# Altium PCB Main.PcbDoc
Units mm, origin at the board's own origin, x right, y up, seen from the top; angles counter-clockwise.
Board outline 198 x 54 mm, 2 copper layers (Top Layer, Bottom Layer); 70 components, 64 nets, 241 pads, 61 vias.
Unrouted connection lines stored in the file: 1.
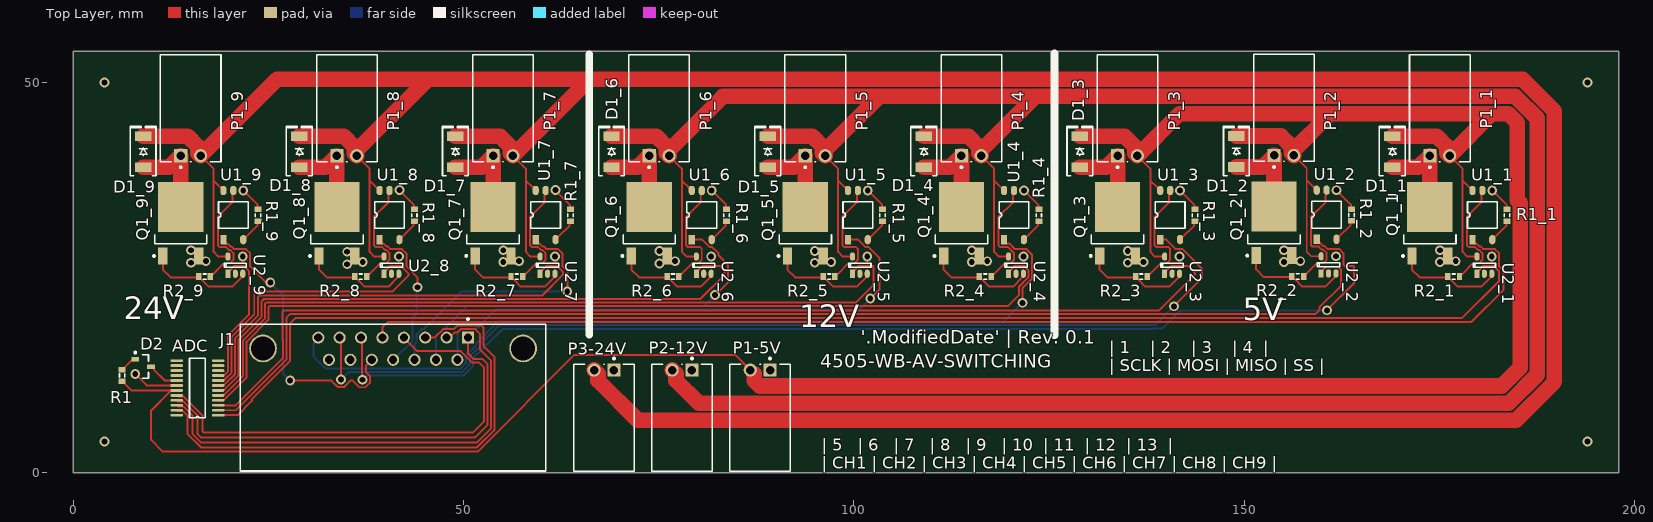
[diagram p0: Top Layer view]
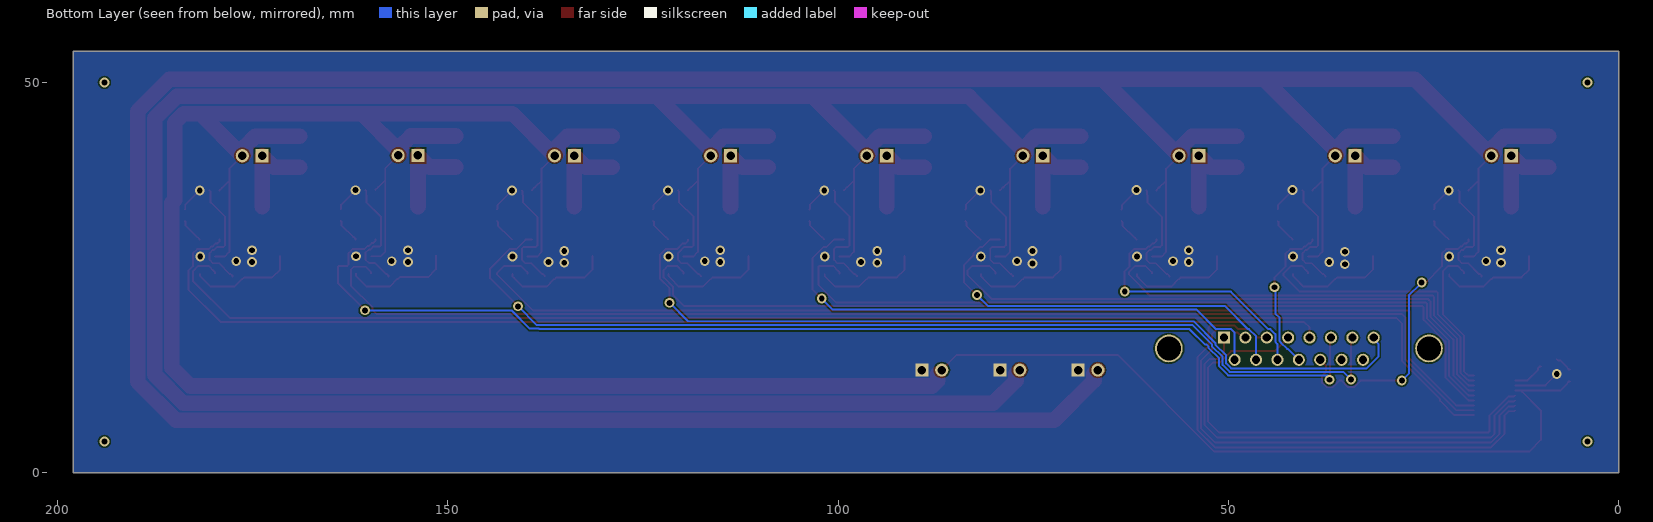
[diagram p1: Bottom Layer view, seen from below]

## Layer stack, top to bottom
Top Solder: solder mask 0.0102, Solder Resist, Dk 3.5
Top Layer: signal copper 0.0356
Dielectric 1: dielectric 0.32, FR-4, Dk 4.8
Bottom Layer: signal copper 0.0356
Bottom Solder: solder mask 0.0102, Solder Resist, Dk 3.5

## Board outline
0,0 198,0 198,54 0,54

## Design rules (kind name [scope] priority, off if disabled: settings)
Clearance [All] p1: gap=0.2 ignorepadtopadclearanceinfootprint=TRUE except(0: Arc-Hole Track-Hole SMDPad-Hole THPad-Hole Via-Hole Fill-Hole Poly-Hole Region-Hole Text-Hole; 2.5: Fill-Fill Fill-Poly Fill-Region Poly-Poly Poly-Region Region-Region)
HoleSize [All] p1: absolutevalues=TRUE maxlimit=5 minlimit=0.025 maxpercent=80.000 minpercent=20.000
MinimumSolderMaskSliver [All] p1: minsoldermaskwidth=0.1
PlaneClearance [All] p1: clearance=0.5
PlaneConnect [All] p1: planeconnectstyle=Direct reliefexpansion=0.508 reliefentries=4 reliefconductorwidth=0.254 reliefairgap=0.254
PolygonConnect [All] p1: connectstyle=Direct reliefconductorwidth=0.254 reliefentries=4 polygonreliefangle="90 Angle" airgapwidth=0.254
RoutingCorners [All] p1: cornerstyle=45-Degree minsetback=2.5 maxsetback=2.5
RoutingVias [All] p1: holewidth=0.75 width=1.25 viastyle="Through Hole" minholewidth=0.75 minwidth=1.25 maxholewidth=1.5 maxwidth=2.5
SilkToSilkClearance [All] p1: silktosilkclearance=0.2
SilkToSolderMaskClearance [IsPad] p1: minsilkscreentomaskgap=0.1 clearancetoexposedcopper=TRUE
SolderMaskExpansion [All] p1: expansion=0.05 istentingtop=FALSE
Width [All] p1: maxlimit=2.5 minlimit=0.25 preferedwidth=0.25 minimp=50.000000 maximp=50.000000 favimp=50.000000
23 further rules are at their usual default settings.

## Classes and differential pairs
channel class "Cuurent Monitored Power Switch": "SW 5-0" "SW 5-1" "SW 5-2" "SW 12-0" "SW 12-1" "SW 12-2" "SW 24-0" "SW 24-1" "SW 24-2"
component class "SW 24-2": D1_9 P1_9 Q1_9 R1_9 R2_9 U1_9 U2_9
component class "SW 24-1": D1_8 P1_8 Q1_8 R1_8 R2_8 U1_8 U2_8
component class "SW 24-0": D1_7 P1_7 Q1_7 R1_7 R2_7 U1_7 U2_7
component class "SW 12-2": D1_6 P1_6 Q1_6 R1_6 R2_6 U1_6 U2_6
component class "SW 12-1": D1_5 P1_5 Q1_5 R1_5 R2_5 U1_5 U2_5
component class "SW 12-0": D1_4 P1_4 Q1_4 R1_4 R2_4 U1_4 U2_4
component class "SW 5-2": D1_3 P1_3 Q1_3 R1_3 R2_3 U1_3 U2_3
component class "SW 5-1": D1_2 P1_2 Q1_2 R1_2 R2_2 U1_2 U2_2
component class "SW 5-0": D1_4 P1_5 Q1_6 R1_4 R2_4 U1_5 U2_4
component class Main: ADC D2 J1 P1-5V P2-12V P3-24V R1

## Components (designator, comment, footprint, x,y, rotation, side; value= is the part's Value field where it differs from the comment)
ADC "MAX11642EEG+" QSOP-24 18.581,7.366 r180 top
D1_1 "GS1GE" "DO214AC SMA" 168.964,41.109 r90 top (schematic designator D1)
D1_2 "GS1GE" "DO214AC SMA" 149.005,41.147 r90 top (schematic designator D1)
D1_3 "GS1GE" "DO214AC SMA" 128.964,41.109 r90 top (schematic designator D1)
D1_4 "GS1GE" "DO214AC SMA" 108.964,41.109 r90 top (schematic designator D1)
D1_5 "GS1GE" "DO214AC SMA" 88.964,41.109 r90 top (schematic designator D1)
D1_6 "GS1GE" "DO214AC SMA" 68.964,41.109 r90 top (schematic designator D1)
D1_7 "GS1GE" "DO214AC SMA" 48.964,41.109 r90 top (schematic designator D1)
D1_8 "GS1GE" "DO214AC SMA" 28.964,41.109 r90 top (schematic designator D1)
D1_9 "GS1GE" "DO214AC SMA" 8.964,41.109 r90 top (schematic designator D1)
D2 "LM4040AIM3-2.0/NOPB" MF03A_L 8.953,13.589 r0 top
J1 "5745782-4" TECO-5745782-4_V 40.98,15.885 r0 top
P1-5V "70553-0001" Molex_70553-0001_MFG 88,7.06 r0 top (schematic designator P1)
P1_1 "70553-0001" Molex_70553-0001_MFG 175.06,46.697 r180 top (schematic designator P1)
P1_2 "70553-0001" Molex_70553-0001_MFG 155.101,46.735 r180 top (schematic designator P1)
P1_3 "70553-0001" Molex_70553-0001_MFG 135.06,46.697 r180 top (schematic designator P1)
P1_4 "70553-0001" Molex_70553-0001_MFG 115.06,46.697 r180 top (schematic designator P1)
P1_5 "70553-0001" Molex_70553-0001_MFG 95.06,46.697 r180 top (schematic designator P1)
P1_6 "70553-0001" Molex_70553-0001_MFG 75.06,46.697 r180 top (schematic designator P1)
P1_7 "70553-0001" Molex_70553-0001_MFG 55.06,46.697 r180 top (schematic designator P1)
P1_8 "70553-0001" Molex_70553-0001_MFG 35.06,46.697 r180 top (schematic designator P1)
P1_9 "70553-0001" Molex_70553-0001_MFG 15.06,46.697 r180 top (schematic designator P1)
P2-12V "70553-0001" Molex_70553-0001_MFG 78,7.06 r0 top (schematic designator P2)
P3-24V "70553-0001" Molex_70553-0001_MFG 68,7.06 r0 top (schematic designator P3)
Q1_1 "IKD03N60RF" INF-PG-TO252-3-21_V 173.79,31.965 r90 top (schematic designator Q1)
Q1_2 "IKD03N60RF" INF-PG-TO252-3-21_V 153.831,32.003 r90 top (schematic designator Q1)
Q1_3 "IKD03N60RF" INF-PG-TO252-3-21_V 133.79,31.965 r90 top (schematic designator Q1)
Q1_4 "IKD03N60RF" INF-PG-TO252-3-21_V 113.79,31.965 r90 top (schematic designator Q1)
Q1_5 "IKD03N60RF" INF-PG-TO252-3-21_V 93.79,31.965 r90 top (schematic designator Q1)
Q1_6 "IKD03N60RF" INF-PG-TO252-3-21_V 73.79,31.965 r90 top (schematic designator Q1)
Q1_7 "IKD03N60RF" INF-PG-TO252-3-21_V 53.79,31.965 r90 top (schematic designator Q1)
Q1_8 "IKD03N60RF" INF-PG-TO252-3-21_V 33.79,31.965 r90 top (schematic designator Q1)
Q1_9 "IKD03N60RF" INF-PG-TO252-3-21_V 13.79,31.965 r90 top (schematic designator Q1)
R1 "0603" J1-0603 6.286,12.446 r270 top value=30K
R1_1 "0603" J1-0603 183.696,32.981 r270 top value=120 (schematic designator R1)
R1_2 "0603" J1-0603 163.737,33.019 r270 top value=120 (schematic designator R1)
R1_3 "0603" J1-0603 143.696,32.981 r270 top value=120 (schematic designator R1)
R1_4 "0603" J1-0603 123.696,32.981 r270 top value=120 (schematic designator R1)
R1_5 "0603" J1-0603 103.696,32.981 r270 top value=120 (schematic designator R1)
R1_6 "0603" J1-0603 83.696,32.981 r270 top value=120 (schematic designator R1)
R1_7 "0603" J1-0603 63.696,32.981 r270 top value=120 (schematic designator R1)
R1_8 "0603" J1-0603 43.696,32.981 r270 top value=120 (schematic designator R1)
R1_9 "0603" J1-0603 23.696,32.981 r270 top value=120 (schematic designator R1)
R2_1 "0603" J1-0603 176.838,25.107 r0 top value=10 (schematic designator R2)
R2_2 "0603" J1-0603 156.879,25.145 r0 top value=10 (schematic designator R2)
R2_3 "0603" J1-0603 136.838,25.107 r0 top value=10 (schematic designator R2)
R2_4 "0603" J1-0603 116.838,25.107 r0 top value=10 (schematic designator R2)
R2_5 "0603" J1-0603 96.838,25.107 r0 top value=10 (schematic designator R2)
R2_6 "0603" J1-0603 76.838,25.107 r0 top value=10 (schematic designator R2)
R2_7 "0603" J1-0603 56.838,25.107 r0 top value=10 (schematic designator R2)
R2_8 "0603" J1-0603 36.838,25.107 r0 top value=10 (schematic designator R2)
R2_9 "0603" J1-0603 16.838,25.107 r0 top value=10 (schematic designator R2)
U1_1 "TLP155E" TB-SO6-5 179.251,29.856 r90 top (schematic designator U1)
U1_2 "TLP155E" TB-SO6-5 159.292,29.894 r90 top (schematic designator U1)
U1_3 "TLP155E" TB-SO6-5 139.251,29.856 r90 top (schematic designator U1)
U1_4 "TLP155E" TB-SO6-5 119.251,29.856 r90 top (schematic designator U1)
U1_5 "TLP155E" TB-SO6-5 99.251,29.856 r90 top (schematic designator U1)
U1_6 "TLP155E" TB-SO6-5 79.251,29.856 r90 top (schematic designator U1)
U1_7 "TLP155E" TB-SO6-5 59.251,29.856 r90 top (schematic designator U1)
U1_8 "TLP155E" TB-SO6-5 39.251,29.856 r90 top (schematic designator U1)
U1_9 "TLP155E" TB-SO6-5 19.251,29.856 r90 top (schematic designator U1)
U2_1 "IR25750" SOT23-5 179.825,25.488 r90 top (schematic designator U2)
U2_2 "IR25750" SOT23-5 159.866,25.526 r90 top (schematic designator U2)
U2_3 "IR25750" SOT23-5 139.825,25.488 r90 top (schematic designator U2)
U2_4 "IR25750" SOT23-5 119.825,25.488 r90 top (schematic designator U2)
U2_5 "IR25750" SOT23-5 99.825,25.488 r90 top (schematic designator U2)
U2_6 "IR25750" SOT23-5 79.825,25.488 r90 top (schematic designator U2)
U2_7 "IR25750" SOT23-5 59.825,25.488 r90 top (schematic designator U2)
U2_8 "IR25750" SOT23-5 39.825,25.488 r90 top (schematic designator U2)
U2_9 "IR25750" SOT23-5 19.825,25.488 r90 top (schematic designator U2)

## Footprints (in the part's own frame and the unit in brackets; to place one, negate y for a bottom-side part, rotate by r counter-clockwise, add the part's x,y. Pads: shape width x height; smd on the part's side, far side on the other; paste and mask are expansions set on the pad)
"DO214AC SMA" [mm] "Molded Diode, 2-Leads, Body 4.30x2.60mm, IPC Medium Density"
  rect 1.27x2.1 smd: 1(-1.985,0) 2(1.985,0)
  silkscreen extent -3.08,-1.65 3.25,1.65, body extent -2.6,-1.37 2.6,1.37, height 2.4
INF-PG-TO252-3-21_V [mm] "DPAK, 3-Leads, Body 6.6x6.1mm, Pitch 2.29mm, Recommended"
  rect 2.2x1.2 smd: 1(-4.2,2.29) 3(-4.2,-2.29)
  rect 6.4x5.8 smd: 2(2.1,0)
  silkscreen extent -4.32,-3.35 -1.5,3.56, body extent -2.65,-3.37 3.58,3.37, height 2.39
J1-0603 [mm] "Chip Resistor, Body 1.6x0.8mm, IPC High Density"
  rect 0.7x0.9 smd: 1(-0.75,0) 2(0.75,0)
  silkscreen extent -0.2,-0.35 0.2,0.35, body extent -0.85,-0.48 0.85,0.48, height 0.9
MF03A_L [mm] "SOT23, 3-Leads, Body 2.9x1.3mm, Pitch 0.95mm, Lead Span 2.4mm, IPC High Density"
  rect 1x0.6 smd: 1(-1,0.95) 2(-1,-0.95) 3(1,0)
  silkscreen extent -1.12,-1.5 0.7,1.92, body extent -0.7,-1.52 0.7,1.52, height 1.12
Molex_70553-0001_MFG [mm]
  rect 1.69x1.69 hole 1.09 paste-1000 mask+0: 1(1.27,6.095)
  round 1.69 hole 1.09 paste-1000 mask+0: 2(-1.27,6.095)
  silkscreen extent -3.88,-6.86 3.88,7.7, body extent -3.98,-6.96 3.98,7.04, height 0.25
QSOP-24 [mm]
  rect 1.6x0.36 smd: 1(0,0)
  oval 1.6x0.36 smd: 2(0,-0.635) 3(0,-1.27) 4(0,-1.905) 5(0,-2.54) 6(0,-3.175) 7(0,-3.81) 8(0,-4.445) 9(0,-5.08) 10(0,-5.715) 11(0,-6.35) 12(0,-6.985) 13(5.31,-6.985) 14(5.31,-6.35) 15(5.31,-5.715) 16(5.31,-5.08) 17(5.31,-4.445) 18(5.31,-3.81) 19(5.31,-3.175) 20(5.31,-2.54) 21(5.31,-1.905) 22(5.31,-1.27) 23(5.31,-0.635) 24(5.31,0)
  silkscreen extent 1.63,-7.3 3.68,0.32
SOT23-5 [mm]
  rect 1.06x0.65 smd: 1(0,0)
  oval 1.06x0.65 smd: 2(0,-0.95) 3(0,-1.9) 4(2.2,-1.9) 5(2.2,0)
  silkscreen extent 0.83,-2.37 1.36,0.48
TB-SO6-5 [mm]
  rect 1.2x0.8 smd: 1(0,0)
  oval 1.2x0.8 smd: 3(0,-2.54) 4(6.3,-2.54) 5(6.3,-1.27) 6(6.3,0)
  silkscreen extent 1.44,-3.18 4.86,0.64
TECO-5745782-4_V [mm] "THD, 15-Leads, Body 39.14x18.8mm, Pitch 2.74mm"
  rect 1.55x1.55 hole 1.04: 1(9.6,1.42)
  round 1.55 hole 1.04: 2(6.86,1.42) 3(4.12,1.42) 4(1.38,1.42) 5(-1.36,1.42) 6(-4.1,1.42) 7(-6.84,1.42) 8(-9.58,1.42) 9(8.23,-1.42) 10(5.49,-1.42) 11(2.75,-1.42) 12(0.01,-1.42) 13(-2.73,-1.42) 14(-5.47,-1.42) 15(-8.21,-1.42)
  round 3.55 hole 3.05: MH1(16.66,0.028) MH2(-16.66,0.028)
  silkscreen extent -19.57,-15.67 19.57,3.91, body extent -19.68,-15.74 19.69,3.2, height 12.55

## Part data
ADC: "ADC Single SAR 300ksps 8-bit Serial 24-Pin QSOP", Case/Package=QSOP, Manufacturer=Maxim, Max Operating Temperature=85°C, Max Power Dissipation=762mW, Min Operating Temperature=-40°C, Operating Supply Voltage=5.25V, Package Quantity=1, Supplier Part Number 1=MAX11642EEG+-ND, Category="Analog to Digital Converters (ADCs)", ComponentLink1Description=https://datasheet.ciiva.com/1275/max11638-max11643-1275940.pdf?src-supplier=Digi-Key, ComponentLink1URL=https://datasheet.ciiva.com/1275/max11638-max11643-1275940.pdf?src-supplier=Digi-Key, ComponentLink2Description=https://datasheet.ciiva.com/14260/max11638-max11643-14260779.pdf?src-supplier=Avnet, ComponentLink2URL=https://datasheet.ciiva.com/14260/max11638-max11643-14260779.pdf?src-supplier=Avnet, ComponentLink3Description=https://datasheet.ciiva.com/16611/max11638-max11643-16611753.pdf?src-supplier=Avnet+Europe, ComponentLink3URL=https://datasheet.ciiva.com/16611/max11638-max11643-16611753.pdf?src-supplier=Avnet+Europe, Conversion Rate=300KS/s, Interface=SPI,Serial, Manufacturer Part Number=MAX11642EEG+, Mount="Surface Mount", Number of A/D Converters=1, Number of Analog Inputs=16, Number of Bits=8, Number of Converters=1, Number of Pins=24, Packaging=Rail/Tube, Polarity=Unipolar, Pricing 1="1=4.05000, 10=3.64100, 25=3.44200, 100=2.83000, 250=2.53940, 500=2.53200 (USD)", Radiation Hardening=No, Resolution=8b, RoHS=Yes, Sampling Rate=300000S/s, Signal to Noise Ratio (SNR)=49dB, Stock 1=132, Supplier 1=Digi-Key, Supply Type=Single
D1_1 D1_2 D1_3 D1_4 D1_5 D1_6 D1_7 D1_8 D1_9: "Diode Switching 400V 1A 2-Pin SMAE T/R", Average Rectified Current=1A, Manufacturer=MCC, Manufacturer Part Number=GS1GE-TP, Max Reverse Voltage (DC)=400V, Supplier Part Number 1=GS1GE-TPMSCT-ND, Category="Rectifier Diodes", ComponentLink1Description=https://media.digikey.com/pdf/Data%20Sheets/Micro%20Commercial%20PDFs/GS1AE-GS1ME(SMAE)_Rev.F_Oct19_2015_DS.pdf?src-supplier=Digi-Key, ComponentLink1URL=https://media.digikey.com/pdf/Data%20Sheets/Micro%20Commercial%20PDFs/GS1AE-GS1ME(SMAE)_Rev.F_Oct19_2015_DS.pdf?src-supplier=Digi-Key, ComponentLink2Description=http://components.arrow.com/part/dataview/43471173S9417573N2022?src-supplier=Arrow, ComponentLink2URL=http://components.arrow.com/part/dataview/43471173S9417573N2022?src-supplier=Arrow, ComponentLink3Description=http://www.mccsemi.com/up_pdf/GS1AE-GS1ME(SMAE).pdf?src-supplier=Digi-Key, ComponentLink3URL=http://www.mccsemi.com/up_pdf/GS1AE-GS1ME(SMAE).pdf?src-supplier=Digi-Key, Lead Free="Lead Free", Mount="Surface Mount", Number of Pins=2, Packaging="Tape and Reel", Pricing 1="1=0.27000, 10=0.22100, 25=0.18560, 100=0.09060, 250=0.08920, 500=0.07560, 1000=0.05253, 2500=0.04882 (USD)", RoHS=Yes, Stock 1=2437, Supplier 1=Digi-Key
D2: library part CMP-0074-00630-2, "Precision Micropower Shunt Voltage Reference, 3-pin SOT-23, Pb-Free", Case/Package=SC, Cathode Current=70uA, Manufacturer="National Semiconductor", Manufacturer Part Number=LM4040EIM7-2.0/NOPB, Max Operating Temperature=85°C, Max Output Current=15mA, Max Output Voltage=2.048V, Min Operating Temperature=-40°C, Package Quantity=1000, PackageTopMarking=RJA*XTT, PowerWise=N, Temperature Coefficient=150ppm/°C, Tolerance=2%, Category="Voltage References", ComponentLink1Description="LM4040 Datasheet", ComponentLink1URL=http://www.national.com/ds/LM/LM4040.pdf, ComponentLink2Description="LM4040 Web Page", ComponentLink2URL=http://www.national.com/pf/LM/LM4040.html, ComponentLink3Description="MF03A Package Page", ComponentLink3URL=http://www.national.com/packaging/folders/mf03a.html, ComponentLink4Description=https://datasheet.ciiva.com/6593/lm4040-n-6593128.pdf?src-supplier=Digi-Key, ComponentLink4URL=https://datasheet.ciiva.com/6593/lm4040-n-6593128.pdf?src-supplier=Digi-Key, ComponentLink5Description=https://datasheet.ciiva.com/26067/lm4040-n-26067450.pdf?src-supplier=Avnet+Europe, ComponentLink5URL=https://datasheet.ciiva.com/26067/lm4040-n-26067450.pdf?src-supplier=Avnet+Europe, ComponentLink6Description=https://datasheet.ciiva.com/14198/lm4040-n-q1-14198445.pdf?src-supplier=Avnet, ComponentLink6URL=https://datasheet.ciiva.com/14198/lm4040-n-q1-14198445.pdf?src-supplier=Avnet, CompType="Voltage Reference IC", DatasheetVersion=Apr-2005, Lead Free="Lead Free", Mount="Surface Mount", Number of Channels=1, Number of Pins=5, Output Current=15mA, Output Voltage=2.048V, PackageDescription="Molded SOT-23, .115 x .051 x .037in Body, 3 Lead, .075 in Pitch", PackageReference=MF03A, PackageVersion="revB, Mar-2003", Packaging="Tape and Reel", PinCount=3, Pricing 1="1=0.44000, 10=0.37500, 25=0.34960, 100=0.25980, 250=0.21980, 500=0.20982 (USD)", Radiation Hardening=No, Reference Type=Shunt, RevisionNote="Component URLs added", RoHS=Y, Stock 1=2945, Supplier 1=Digi-Key
J1: library part CMP-2000-05646-1, "Female D-Sub Connector, Pitch 2.74 mm, 2 Row, 15 Position, Height 12.93 mm, Tail Length 3.18 mm, -55 to 105 degC, RoHS, Tray", Color=Black, Current Rating=6A, Manufacturer="TE Connectivity", Operating Temperature=-55°C~105°C, Package Description="Female D-Sub Connector, Pitch 2.74 mm, 2 Row, 15 Position, Height 12.93 mm, Tail Length 3.18 mm", Standard Package=104, Voltage Rating=125V, 3D Model=5745782-4.pdf, Catalog Drawings=AMPD-SubMale.318, Category=Connectors,Interconnects, Connector Style=D-Sub, Connector Type=Receptacle,FemaleSockets, Contact Finish=Gold, Contact Finish Thickness=30µin(0.76µm), Contact Type=Signal, Datasheet URL=http://www.te.com/commerce/DocumentDelivery/DDEController?Action=srchrtrv&DocNm=5745782&DocType=Customer+Drawing&DocLang=English, Datasheet Version="Rev. R, 08/2011", Dynamic Catalog=AMPLIMITEHD-20Series, Family=D-SubConnectors, Featured Product=AMPLIMITED-SubminiatureConnectors, Features=GroundStrap, Flange Feature=Housing/Shell(4-40), Housing Material=Thermoplastic, Manufacturer URL=http://www.te.com/, Mating Products="1-745494-8-ND / -CONNPLUG15POS26-22AWGGOLD/FL / A34118-ND / -CONND-SUBPLUG15P22-26AWGAU / A32503-ND / -CONNDSUBPLUG15POSSLDCUP / AMR15B-ND / -CONND-SUBPLUG15POSGOLD / AML15B-ND / -CONND-SUBPLUG15POSGOLD / A31968-ND / -CONND-SUBPLUG15P22-26AWGAU / A31967-ND / -CONND-SUBPLUG15P26-30AWGAU", Mounting Technology=ThroughHole, Mounting Type=ThroughHole,RightAngle, Number of Positions=15, Number of Rows=2, Other Names=A32076, Package Reference=5745782-4, Product Training Modules=AMPLIMITED-SubConnectors, RoHS Information=5745782-4StatementofCompliance, Series=AMPLIMITEHD-20, Shell Material, Finish=Steel,TinPlated, Shell Size, Connector Layout=2(DA,A), Termination=Solder
P1-5V P2-12V P3-24V: "Molex Connector 2 pin 90 degree through hole .100"
P1_1 P1_2 P1_3 P1_4 P1_5 P1_6 P1_7 P1_8 P1_9: "24V power in"
Q1_1 Q1_2 Q1_3 Q1_4 Q1_5 Q1_6 Q1_7 Q1_8 Q1_9: library part CMP-1166-00103-1, "600 V TrenchStop RC-Series for Hard Switching Applications up to 30 KHz, 5 A IC, -40 to 175 degC, PG-TO252-3-21, Reel, Green", Manufacturer=Infineon, Switching Frequency="RC Drives Fast Series 4 - 30 kHz", ComponentLink1Description="Manufacturer URL", ComponentLink1URL=http://www.infineon.com/, ComponentLink2Description=Datasheet, ComponentLink2URL=http://www.infineon.com/dgdl/IKD03N60RF+Rev+2.2.pdf?folderId=db3a3043156fd5730115f56849b61941&fileId=db3a30433c5c92fb013c5d3978350068, ComponentLink3Description="Package Specification", ComponentLink3URL=http://www.infineon.com/cms/packages/SMD_-_Surface_Mounted_Devices/P-PG-TO252/P-PG-TO252-03-021.html?__locale=en, DatasheetVersion="Rev. 2.2", Eoff(typ)="0.04Â mJ", Eon(typ)="0.05Â mJ", Green=TRUE, Halogen-free=TRUE, IC(max)@ 25degrees="5Â A", IC(max)@ 100degrees="2.5Â A", ICpuls(max)="7.5Â A", IF (max)="5Â A", IFpuls(max)="7.5Â A", Irrm(typ)="3.8 A", Mounting Technology="Surface Mount", PackageDescription="3-Pin Plastic (Green) Transistor Single Outline Package, Body 6.1 x 6.6 mm, Pitch 2.29 mm", PackageReference=PG-TO252-3-21, Packing=Reel, PartNumber=IKD03N60RF, Product Type=IKD03N60RF, Ptot(max)="53.6 W", QGate (typ)="17.1Â nC", Qrr(typ)="0.06Â uC", td(off) (typ)="128 ns", td(on)(typ)="10 ns", tf(typ)="93 ns", tr(typ)="8 ns", VCE(max)="600Â V", VCE(sat)(typ)="2.2Â V", VF (typ)="2.1Â V"
R1 R1_1 R1_2 R1_3 R1_4 R1_5 R1_6 R1_7 R1_8 R1_9 R2_1 R2_2 R2_3 R2_4 R2_5 R2_6 R2_7 R2_8 R2_9: library part Res3, "Resistor", LatestRevisionDate=29-May-2009, LatestRevisionNote="IPC-7351 Footprint Added.", PackageDescription="Chip Resistor", PackageReference=J1-0603, Published=8-Jun-2000, Publisher="Altium Limited"
U1_1 U1_2 U1_3 U1_4 U1_5 U1_6 U1_7 U1_8 U1_9: "Logic gate drive optocoupler 7.5mA input threshold .6A peak output current 10V-30V output supply"
U2_1 U2_2 U2_3 U2_4 U2_5 U2_6 U2_7 U2_8 U2_9: "1.8V/2.5V/3.3V/5V/9V/12V/15V/18V/24V 5-Pin SOT-23 T/R", Case/Package=SOT-23-5, Manufacturer="International Rectifier", Manufacturer Part Number=IR25750LTRPBF, Max Operating Temperature=125°C, Max Supply Current=50uA, Max Supply Voltage=600V, Min Operating Temperature=-40°C, Min Supply Voltage=-3V, Package Quantity=1, Supplier Part Number 1=IR25750LTRPBFCT-ND, Category="Power Management ICs", ComponentLink1Description=https://datasheet.ciiva.com/29590/ir25750lpbf-preliminary-29590193.pdf?src-supplier=Digi-Key, ComponentLink1URL=https://datasheet.ciiva.com/29590/ir25750lpbf-preliminary-29590193.pdf?src-supplier=Digi-Key, Height=1.3mm, Lead Free="Lead Free", Length=3mm, Mount="Surface Mount", Number of Pins=5, Operating Supply Current=50uA, Packaging="Tape and Reel", Pricing 1="1=0.79000, 10=0.69900, 25=0.65680, 100=0.49790, 250=0.42376, 500=0.40256, 1000=0.30721 (USD)", RoHS=Yes, Stock 1=2771, Supplier 1=Digi-Key, Weight=0.001058oz, Width=1.75mm

## Via types
v1: diameter 1.25, hole 0.75, Top Layer to Bottom Layer, 61 vias

## Nets (pads, with @x,y where several pads share a name; then routed paths per layer and width w, separated by ;. In a path a pad name is that pad's centre, name@x,y a point inside that pad or via, vN(x,y) a via of type N, cw(c..) or ccw(c..) an arc to the next point about the centre after c; other vN are vias at no path point)
+5: ADC.19 D1_1.2 D1_2.2 D1_3.2 P1-5V.2 P1_1.2 P1_2.2 P1_3.2 R1.2 U1_1.6 U1_2.6 U1_3.6 U2_1.5 U2_2.5 U2_3.5 | length 374.3
  Top Layer w0.25: R1.2 6.386,11.696 6.611,11.471 6.611,11.371 7.441,10.541 ADC.19@12.621,10.541 ; ADC.19 ADC.19@12.621,10.541 ; P1-5V.2@87.225,12.66 P1-5V.2 84.785,15.1 64.2,15.1 51.8,2.7 11.5,2.7 10,4.2 10,7.969 12.442,10.411 12.491,10.411 ADC.19@12.621,10.541 ; P1_3.2 137.981,38.951 137.981,37.426 ; U1_3.6 139.251,36.207 138.904,36.554 138.853,36.554 137.981,37.426 ; U2_3.5 138.575,27.688 137.981,28.282 137.981,37.426 ; P1_2.2 158.022,38.989 158.022,37.464 ; U1_2.6 159.292,36.245 158.945,36.592 158.894,36.592 158.022,37.464 ; U2_2.5 158.616,27.726 158.022,28.32 158.022,37.464 ; P1_1.2 177.981,38.951 177.981,37.426 ; U1_1.6 179.251,36.207 178.904,36.554 178.853,36.554 177.981,37.426 ; U2_1.5 178.575,27.688 177.981,28.282 177.981,37.426
  Top Layer w2: P1-5V.2@87.225,12.66 87.225,11.813 87.928,11.11 183,11.11 185.346,13.456 185.346,34.578 185,34.924 185,44.828 183.828,46 181.728,46 ; D1_3.2 134.685,43.094 135.99,41.789 135.99,40.942 P1_3.2 141.728,46 161.051,46 ; D1_2.2 154.726,43.132 156.031,41.827 P1_2.2@156.031,40.98 ; P1_2.2 P1_2.2@156.031,40.98 ; D1_1.2 174.685,43.094 175.99,41.789 175.99,40.942 P1_1.2 181.728,46 ; P1_2.2@156.031,40.98 161.051,46 ; 161.051,46 181.728,46
+12: D1_4.2 D1_5.2 D1_6.2 P1_4.2 P1_5.2 P1_6.2 P2-12V.2 U1_4.6 U1_5.6 U1_6.6 U2_4.5 U2_5.5 U2_6.5 | length 361.1
  Top Layer w0.25: P1_6.2 77.981,38.951 77.981,37.426 ; U1_6.6 79.251,36.207 78.904,36.554 78.853,36.554 77.981,37.426 ; U2_6.5 78.575,27.688 77.981,28.282 77.981,37.426 ; P1_5.2 97.981,38.951 97.981,37.426 ; U1_5.6 99.251,36.207 98.904,36.554 98.853,36.554 97.981,37.426 ; U2_5.5 98.575,27.688 97.981,28.282 97.981,37.426 ; P1_4.2 117.981,38.951 117.981,37.426 ; U1_4.6 119.251,36.207 118.904,36.554 118.853,36.554 117.981,37.426 ; U2_4.5 118.575,27.688 117.981,28.282 117.981,37.426
  Top Layer w2: D1_6.2 74.685,43.094 75.99,41.789 P1_6.2@75.99,40.942 ; P1_6.2 P1_6.2@75.99,40.942 ; P2-12V.2 77.225,12.66 77.225,11.813 80.128,8.91 183.911,8.91 187.546,12.545 187.546,45.394 184.74,48.2 123.248,48.2 ; D1_5.2 94.685,43.094 95.99,41.789 P1_5.2@95.99,40.942 ; P1_5.2 P1_5.2@95.99,40.942 ; D1_4.2 114.685,43.094 115.99,41.789 P1_4.2@115.99,40.942 ; P1_4.2 P1_4.2@115.99,40.942 ; P1_6.2@75.99,40.942 83.248,48.2 103.248,48.2 ; P1_5.2@95.99,40.942 103.248,48.2 ; 103.248,48.2 123.248,48.2 ; P1_4.2@115.99,40.942 123.248,48.2
+24: D1_7.2 D1_8.2 D1_9.2 P1_7.2 P1_8.2 P1_9.2 P3-24V.2 U1_7.6 U1_8.6 U1_9.6 U2_7.5 U2_8.5 U2_9.5 | length 446.6
  Top Layer w0.25: P1_9.2 17.981,38.951 17.981,37.426 ; U1_9.6 19.251,36.207 18.904,36.554 18.853,36.554 17.981,37.426 ; U2_9.5 18.575,27.688 17.981,28.282 17.981,37.426 ; P1_8.2 37.981,38.951 37.981,37.426 ; U1_8.6 39.251,36.207 38.904,36.554 38.853,36.554 37.981,37.426 ; U2_8.5 38.575,27.688 37.981,28.282 37.981,37.426 ; P1_7.2 57.981,38.951 57.981,37.426 ; U1_7.6 59.251,36.207 58.904,36.554 58.853,36.554 57.981,37.426 ; U2_7.5 58.575,27.688 57.981,28.282 57.981,37.426
  Top Layer w2: D1_9.2 14.685,43.094 15.99,41.789 15.99,40.942 P1_9.2 26.128,50.4 45.1,50.4 ; D1_8.2 34.685,43.094 35.99,41.789 P1_8.2@35.99,40.942 ; P1_8.2 P1_8.2@35.99,40.942 ; D1_7.2 54.685,43.094 55.99,41.789 55.99,40.942 P1_7.2 66.128,50.4 ; P3-24V.2 67.225,12.66 67.225,11.813 72.328,6.71 184.823,6.71 189.746,11.633 189.746,46.305 185.651,50.4 66.128,50.4 ; P1_8.2@35.99,40.942 45.1,50.052 45.1,50.4 ; 45.1,50.4 66.128,50.4
AIN0: ADC.1 U2_1.1 | length 179
  Top Layer w0.25: ADC.1 21.066,7.366 22.9,9.2 22.9,9.427 27.77,14.297 27.77,19.07 28.54,19.84 177.94,19.84 182.646,24.546 182.646,25.824 181.967,26.504 180.648,26.504 180.037,25.893 180.025,25.893 179.825,25.693 U2_1.1
AIN1: ADC.2 U2_2.1 | length 159
  Top Layer w0.25: ADC.2 20.837,8.001 27.32,14.484 27.32,19.87 27.8,20.35 159.15,20.35 159.64,20.84 159.64,21.198 162.416,23.974 162.416,26 162.035,26.381 160.516,26.381 159.866,25.731 U2_2.1
AIN2: ADC.3 U2_3.1 | length 140.6
  Top Layer w0.25: ADC.3 20.836,8.636 26.87,14.67 26.87,16.969 26.8,17.039 26.8,20.654 26.946,20.8 139.1,20.8 143.678,25.378 143.678,25.585 142.76,26.504 140.648,26.504 140.037,25.893 140.025,25.893 139.825,25.693 U2_3.1
AIN3: ADC.4 U2_4.1 | length 118.8
  Top Layer w0.25: ADC.4 19.231,9.271 19.361,9.401 19.417,9.401 22.22,12.204 22.22,16.783 25,19.563 25,21.204 25.146,21.35 119.75,21.35 121.15,22.75 121.15,23.789 122.375,25.014 122.375,25.962 121.833,26.504 120.648,26.504 120.037,25.893 120.025,25.893 119.825,25.693 U2_4.1
AIN4: ADC.5 U2_5.1 | length 99.2
  Top Layer w0.25: ADC.5 19.231,9.906 19.361,10.036 19.416,10.036 21.77,12.39 21.77,16.969 24.55,19.749 24.55,21.65 24.7,21.8 100.242,21.8 102.539,24.097 102.539,26.358 102.393,26.504 100.648,26.504 100.037,25.893 100.025,25.893 99.825,25.693 U2_5.1
AIN5: ADC.6 U2_6.1 | length 79.8
  Top Layer w0.25: ADC.6 19.231,10.541 19.361,10.671 19.414,10.671 21.2,12.457 21.2,17.036 24.1,19.936 24.1,21.904 24.446,22.25 80.35,22.25 83.45,25.35 83.45,25.861 82.807,26.504 80.648,26.504 80.037,25.893 80.025,25.893 79.825,25.693 U2_6.1
AIN6: ADC.7 U2_7.1 | length 58.3
  Top Layer w0.25: ADC.7 19.231,11.176 19.361,11.306 19.413,11.306 20.75,12.643 20.75,17.222 23.65,20.122 23.65,22.504 23.846,22.7 60.061,22.7 62.746,25.385 62.746,25.724 61.967,26.504 60.648,26.504 60.037,25.893 60.025,25.893 59.825,25.693 U2_7.1
AIN7: ADC.8 U2_8.1 | length 38.6
  Top Layer w0.25: ADC.8 19.231,11.811 19.361,11.941 19.412,11.941 20.3,12.829 20.3,17.409 23.2,20.309 23.2,23.054 23.346,23.2 40.9,23.2 42.982,25.282 42.982,25.489 41.967,26.504 40.648,26.504 40.037,25.893 40.025,25.893 39.825,25.693 U2_8.1
AIN8: ADC.9 U2_9.1 | length 19
  Top Layer w0.25: ADC.9 19.231,12.446 19.361,12.576 19.41,12.576 19.85,13.016 19.85,17.595 22.55,20.295 22.55,25.787 21.833,26.504 20.648,26.504 20.037,25.893 20.025,25.893 19.825,25.693 U2_9.1
GND: ADC.18 D2.2 P1-5V.1 P2-12V.1 P3-24V.1 Q1_1.3 Q1_2.3 Q1_3.3 Q1_4.3 Q1_5.3 Q1_6.3 Q1_7.3 Q1_8.3 Q1_9.3 R1_1.1 R1_2.1 R1_3.1 R1_4.1 R1_5.1 R1_6.1 R1_7.1 R1_8.1 R1_9.1 U1_1.4 U1_2.4 U1_3.4 U1_4.4 U1_5.4 U1_6.4 U1_7.4 U1_8.4 U1_9.4 U2_1.4 U2_2.4 U2_3.4 U2_4.4 U2_5.4 U2_6.4 U2_7.4 U2_8.4 U2_9.4 | length 35.2
  Top Layer w0.25: v1(7.953,12.639) 8.153,12.639 8.328,12.464 8.328,12.264 9.403,11.189 10.061,11.189 10.074,11.176 ADC.18 ; v1(21.791,36.156) 21.791,36.105 22.045,35.851 22.096,35.851 23.637,34.31 23.637,33.79 R1_9.1 ; U1_8.4 41.791,36.105 42.045,35.851 42.096,35.851 43.637,34.31 43.637,33.79 R1_8.1 ; U1_7.4 61.791,36.105 62.045,35.851 62.096,35.851 63.637,34.31 63.637,33.79 R1_7.1 ; v1(81.791,36.156) 81.791,36.105 82.045,35.851 82.096,35.851 83.637,34.31 83.637,33.79 R1_6.1 ; v1(101.791,36.156) 101.791,36.105 102.045,35.851 102.096,35.851 103.637,34.31 103.637,33.79 R1_5.1 ; v1(121.791,36.156) 121.791,36.105 122.045,35.851 122.096,35.851 123.637,34.31 123.637,33.79 R1_4.1 ; v1(141.791,36.156) 141.791,36.105 142.045,35.851 142.096,35.851 143.637,34.31 143.637,33.79 R1_3.1 ; v1(161.832,36.194) 161.832,36.143 162.086,35.889 162.137,35.889 163.678,34.348 163.678,33.828 R1_2.1 ; v1(181.791,36.156) 181.791,36.105 182.045,35.851 182.096,35.851 183.637,34.31 183.637,33.79 R1_1.1
  other v1: 35.1,26.7 75.1,26.8 15.1,26.9 95,26.9 135.1,26.9 37.1,27 55.1,27 97.1,27 115.1,27 137.1,27 155.1,27 175.1,27 17,27.1 57.1,27.1 77.1,27.1 117.1,27.1 157.2,27.1 177.1,27.1 21.725,27.688 41.725,27.688 61.725,27.688 81.725,27.688 101.725,27.688 121.725,27.688 141.725,27.688 181.725,27.688 161.766,27.726 35.1,28.3 75.1,28.4 95,28.4 135.1,28.4 15.1,28.5 55.1,28.5 115.1,28.5 155.1,28.5 175.1,28.5 41.8,36.2 61.8,36.2
NetADC_17: ADC.17 D2.3 | length 4.2
  Top Layer w0.25: D2.3 10.153,13.589 10.328,13.414 10.328,13.214 11.731,11.811 ADC.17
NetADC_20: ADC.20 J1.4 | length 61.9
  Top Layer w0.25: ADC.20 13.401,9.776 14.104,9.776 16.573,7.307 16.573,5.281 16.719,5.135 51.158,5.135 52.641,6.618 52.641,13.462 52.006,14.097 51.134,14.097 49.666,15.565 44.1,15.565 J1.4
NetADC_21: ADC.21 J1.1 | length 56.7
  Top Layer w0.25: ADC.21 13.401,9.141 14.103,9.141 15.938,7.306 15.938,4.952 16.39,4.5 51.421,4.5 53.091,6.17 53.091,13.91 52.455,14.546 52.193,14.546 52.192,14.547 51.32,14.547 50.58,15.287 J1.1
NetADC_22: ADC.22 J1.2 | length 62
  Top Layer w0.25: ADC.22 13.401,8.506 14.102,8.506 15.303,7.305 15.303,4.95 16.388,3.865 51.684,3.865 53.541,5.722 53.541,14.358 52.13,15.769 52.13,17.765 51.49,18.405 49.67,18.405 49.22,17.955 48.816,17.955 48.166,17.305 J1.2
NetADC_23: ADC.23 J1.3 | length 66.9
  Top Layer w0.25: ADC.23 13.401,7.871 14.1,7.871 14.668,7.303 14.668,4.949 16.387,3.23 51.694,3.23 53.991,5.527 53.991,14.806 52.58,16.217 52.58,18.588 52.312,18.855 49.484,18.855 49.479,18.85 49.225,18.85 48.78,18.405 47.384,18.405 46.284,17.305 J1.3
NetD1_1_1: D1_1.1 P1_1.1 Q1_1.2 | length 12
  Top Layer w2: D1_1.1 172.312,39.124 P1_1.1 Q1_1.2
NetD1_2_1: D1_2.1 P1_2.1 Q1_2.2 | length 12
  Top Layer w2: D1_2.1 152.353,39.162 P1_2.1 Q1_2.2
NetD1_3_1: D1_3.1 P1_3.1 Q1_3.2 | length 12
  Top Layer w2: D1_3.1 132.312,39.124 P1_3.1 Q1_3.2
NetD1_4_1: D1_4.1 P1_4.1 Q1_4.2 | length 12
  Top Layer w2: D1_4.1 112.312,39.124 P1_4.1 Q1_4.2
NetD1_5_1: D1_5.1 P1_5.1 Q1_5.2 | length 12
  Top Layer w2: D1_5.1 92.312,39.124 P1_5.1 Q1_5.2
NetD1_6_1: D1_6.1 P1_6.1 Q1_6.2 | length 12
  Top Layer w2: D1_6.1 72.312,39.124 P1_6.1 Q1_6.2
NetD1_7_1: D1_7.1 P1_7.1 Q1_7.2 | length 12
  Top Layer w2: D1_7.1 52.312,39.124 P1_7.1 Q1_7.2
NetD1_8_1: D1_8.1 P1_8.1 Q1_8.2 | length 12
  Top Layer w2: D1_8.1 32.312,39.124 P1_8.1 Q1_8.2
NetD1_9_1: D1_9.1 P1_9.1 Q1_9.2 | length 12
  Top Layer w2: D1_9.1 12.312,39.124 P1_9.1 Q1_9.2
NetD2_1: D2.1 R1.1 | length 2.3
  Top Layer w0.25: R1.1 6.386,13.196 6.611,13.421 6.611,13.521 7.454,14.364 7.778,14.364 D2.1
NetQ1_1_1: Q1_1.1 R2_1.1 U2_1.3 | length 13.8
  Top Layer w0.25: Q1_1.1 171.5,26 172.493,25.007 176.088,25.007 176.313,24.782 176.413,24.782 177.358,23.837 180.394,23.837 181.538,24.981 181.538,24.987 181.725,25.175 U2_1.3
NetQ1_2_1: Q1_2.1 R2_2.1 U2_2.3 | length 13.8
  Top Layer w0.25: Q1_2.1 151.541,26.038 152.534,25.045 156.129,25.045 156.354,24.82 156.454,24.82 157.399,23.875 160.435,23.875 161.579,25.019 161.579,25.025 161.766,25.213 U2_2.3
NetQ1_3_1: Q1_3.1 R2_3.1 U2_3.3 | length 13.8
  Top Layer w0.25: Q1_3.1 131.5,26 132.493,25.007 136.088,25.007 136.313,24.782 136.413,24.782 137.358,23.837 140.394,23.837 141.538,24.981 141.538,24.987 141.725,25.175 U2_3.3
NetQ1_4_1: Q1_4.1 R2_4.1 U2_4.3 | length 13.8
  Top Layer w0.25: Q1_4.1 111.5,26 112.493,25.007 116.088,25.007 116.313,24.782 116.413,24.782 117.358,23.837 120.394,23.837 121.538,24.981 121.538,24.987 121.725,25.175 U2_4.3
NetQ1_5_1: Q1_5.1 R2_5.1 U2_5.3 | length 13.8
  Top Layer w0.25: Q1_5.1 91.5,26 92.493,25.007 96.088,25.007 96.313,24.782 96.413,24.782 97.358,23.837 100.394,23.837 101.538,24.981 101.538,24.987 101.725,25.175 U2_5.3
NetQ1_6_1: Q1_6.1 R2_6.1 U2_6.3 | length 13.8
  Top Layer w0.25: Q1_6.1 71.5,26 72.493,25.007 76.088,25.007 76.313,24.782 76.413,24.782 77.358,23.837 80.394,23.837 81.538,24.981 81.538,24.987 81.725,25.175 U2_6.3
NetQ1_7_1: Q1_7.1 R2_7.1 U2_7.3 | length 13.8
  Top Layer w0.25: Q1_7.1 51.5,26 52.493,25.007 56.088,25.007 56.313,24.782 56.413,24.782 57.358,23.837 60.394,23.837 61.538,24.981 61.538,24.987 61.725,25.175 U2_7.3
NetQ1_8_1: Q1_8.1 R2_8.1 U2_8.3 | length 13.8
  Top Layer w0.25: Q1_8.1 31.5,26 32.493,25.007 36.088,25.007 36.313,24.782 36.413,24.782 37.358,23.837 40.394,23.837 41.538,24.981 41.538,24.987 41.725,25.175 U2_8.3
NetQ1_9_1: Q1_9.1 R2_9.1 U2_9.3 | length 13.8
  Top Layer w0.25: Q1_9.1 11.5,26 12.493,25.007 16.088,25.007 16.313,24.782 16.413,24.782 17.358,23.837 20.394,23.837 21.538,24.981 21.538,24.987 21.725,25.175 U2_9.3
NetR1_1_2: R1_1.2 U1_1.3 | length 3.2
  Top Layer w0.25: U1_1.3 181.791,29.907 182.045,30.161 182.096,30.161 183.587,31.652 183.587,32.122 R1_1.2
NetR1_2_2: R1_2.2 U1_2.3 | length 3.2
  Top Layer w0.25: U1_2.3 161.832,29.945 162.086,30.199 162.137,30.199 163.628,31.69 163.628,32.16 R1_2.2
NetR1_3_2: R1_3.2 U1_3.3 | length 3.2
  Top Layer w0.25: U1_3.3 141.791,29.907 142.045,30.161 142.096,30.161 143.587,31.652 143.587,32.122 R1_3.2
NetR1_4_2: R1_4.2 U1_4.3 | length 3.2
  Top Layer w0.25: U1_4.3 121.791,29.907 122.045,30.161 122.096,30.161 123.587,31.652 123.587,32.122 R1_4.2
NetR1_5_2: R1_5.2 U1_5.3 | length 3.2
  Top Layer w0.25: U1_5.3 101.791,29.907 102.045,30.161 102.096,30.161 103.587,31.652 103.587,32.122 R1_5.2
NetR1_6_2: R1_6.2 U1_6.3 | length 3.2
  Top Layer w0.25: U1_6.3 81.791,29.907 82.045,30.161 82.096,30.161 83.587,31.652 83.587,32.122 R1_6.2
NetR1_7_2: R1_7.2 U1_7.3 | length 3.2
  Top Layer w0.25: U1_7.3 61.791,29.907 62.045,30.161 62.096,30.161 63.587,31.652 63.587,32.122 R1_7.2
NetR1_8_2: R1_8.2 U1_8.3 | length 3.2
  Top Layer w0.25: U1_8.3 41.791,29.907 42.045,30.161 42.096,30.161 43.587,31.652 43.587,32.122 R1_8.2
NetR1_9_2: R1_9.2 U1_9.3 | length 3.2
  Top Layer w0.25: U1_9.3 21.791,29.907 22.045,30.161 22.096,30.161 23.587,31.652 23.587,32.122 R1_9.2
NetR2_1_2: R2_1.2 U1_1.5 | length 15
  Top Layer w0.25: R2_1.2 177.588,25.207 177.813,25.432 177.913,25.432 179.314,26.833 180.094,26.833 180.521,27.26 180.521,28.116 180.094,28.543 179.928,28.543 179.54,28.931 178.716,28.931 178.526,29.121 178.526,32.764 180.394,34.632 180.394,35.535 180.416,35.556 180.416,36.051 U1_1.5
NetR2_2_2: R2_2.2 U1_2.5 | length 15
  Top Layer w0.25: R2_2.2 157.629,25.245 157.854,25.47 157.954,25.47 159.355,26.871 160.135,26.871 160.562,27.298 160.562,28.154 160.135,28.581 159.969,28.581 159.581,28.969 158.757,28.969 158.567,29.159 158.567,32.802 160.435,34.67 160.435,35.573 160.457,35.594 160.457,36.089 U1_2.5
NetR2_3_2: R2_3.2 U1_3.5 | length 15.3
  Top Layer w0.25: R2_3.2 137.588,25.207 137.813,25.432 137.913,25.432 139.314,26.833 140.094,26.833 140.521,27.26 140.521,28.663 140.253,28.931 138.716,28.931 138.526,29.121 138.526,32.764 140.394,34.632 140.394,35.535 140.416,35.556 140.416,36.051 U1_3.5
NetR2_4_2: R2_4.2 U1_4.5 | length 15
  Top Layer w0.25: R2_4.2 117.588,25.207 117.813,25.432 117.913,25.432 119.314,26.833 120.094,26.833 120.521,27.26 120.521,28.116 119.706,28.931 118.716,28.931 118.526,29.121 118.526,32.764 120.394,34.632 120.394,35.535 120.416,35.556 120.416,36.051 U1_4.5
NetR2_5_2: R2_5.2 U1_5.5 | length 15.3
  Top Layer w0.25: R2_5.2 97.588,25.207 97.813,25.432 97.913,25.432 99.314,26.833 100.094,26.833 100.521,27.26 100.521,28.663 100.253,28.931 98.716,28.931 98.526,29.121 98.526,32.764 100.394,34.632 100.394,35.535 100.416,35.556 100.416,36.051 U1_5.5
NetR2_6_2: R2_6.2 U1_6.5 | length 15.3
  Top Layer w0.25: R2_6.2 77.588,25.207 77.813,25.432 77.913,25.432 79.314,26.833 80.094,26.833 80.521,27.26 80.521,28.663 80.253,28.931 78.716,28.931 78.526,29.121 78.526,32.764 80.394,34.632 80.394,35.535 80.416,35.556 80.416,36.051 U1_6.5
NetR2_7_2: R2_7.2 U1_7.5 | length 15
  Top Layer w0.25: R2_7.2 57.588,25.207 57.813,25.432 57.913,25.432 59.314,26.833 60.094,26.833 60.521,27.26 60.521,28.116 60.094,28.543 59.928,28.543 59.54,28.931 58.716,28.931 58.526,29.121 58.526,32.764 60.394,34.632 60.394,35.535 60.416,35.556 60.416,36.051 U1_7.5
NetR2_8_2: R2_8.2 U1_8.5 | length 15
  Top Layer w0.25: R2_8.2 37.588,25.207 37.813,25.432 37.913,25.432 39.314,26.833 40.094,26.833 40.521,27.26 40.521,28.116 40.094,28.543 39.928,28.543 39.54,28.931 38.716,28.931 38.526,29.121 38.526,32.764 40.394,34.632 40.394,35.535 40.416,35.556 40.416,36.051 U1_8.5
NetR2_9_2: R2_9.2 U1_9.5 | length 15
  Top Layer w0.25: R2_9.2 17.588,25.207 17.813,25.432 17.913,25.432 19.314,26.833 20.094,26.833 20.521,27.26 20.521,28.116 20.094,28.543 19.928,28.543 19.54,28.931 18.716,28.931 18.526,29.121 18.526,32.764 20.394,34.632 20.394,35.535 20.416,35.556 20.416,36.051 U1_9.5
SW5-0: J1.5 U1_1.1 | length 156
  Top Layer w0.25: J1.5 39.62,18.62 40.3,19.3 49.292,19.3 49.298,19.305 179.105,19.305 183.2,23.4 183.2,25.907 182.675,26.432 182.675,28.081 182.119,28.638 180.636,28.638 180.281,28.993 180.114,28.993 179.726,29.381 179.526,29.381 179.251,29.656 U1_1.1
SW5-1: J1.6 U1_2.1 | length 147.9
  Top Layer w0.25: J1.6 37,17.185 37,11.955 v1(37.049,11.907) ; U1_2.1 159.292,29.694 159.567,29.419 159.767,29.419 160.155,29.031 160.322,29.031 160.677,28.676 162.16,28.676 162.716,28.119 162.716,26.646 162.862,26.5 163.954,26.5 164.1,26.354 164.1,24.3 v1(160.6,20.8)
  Bottom Layer w0.25: v1(37.049,11.907) 37,11.955 37,12.165 37.3,12.465 50.038,12.465 51.21,13.637 51.21,14.653 52.58,16.023 52.58,16.18 52.8,16.4 53,16.4 55,18.4 138.3,18.4 138.35,18.45 139.498,18.45 141.848,20.8 v1(160.6,20.8)
SW5-2: J1.7 U1_3.1 | length 130
  Top Layer w0.25: J1.7 34.3,17.145 v1(34.3,11.94) ; U1_3.1 140.044,29.856 141.262,28.638 142.118,28.638 144.6,26.156 144.6,24.9 141.01,21.31 v1(141,21.31)
  Bottom Layer w0.25: v1(34.3,11.94) 35.275,12.915 49.852,12.915 50.76,13.823 50.76,14.839 52.13,16.209 52.13,16.43 54.6,18.9 138.59,18.9 v1(141,21.31)
SW12-0: J1.8 U1_4.1 | length 109.5
  Top Layer w0.25: U1_4.1 119.251,29.656 119.526,29.381 119.893,29.381 120.617,28.656 122.1,28.656 122.825,27.932 122.825,24.827 121.6,23.602 v1(121.6,21.76)
  Bottom Layer w0.25: J1.8 31.4,17.109 30.8,16.509 30.8,14.88 32.314,13.365 49.666,13.365 50.31,14.01 50.31,15.026 51.68,16.396 51.68,16.616 54.464,19.4 119.24,19.4 v1(121.6,21.76)
SW12-1: J1.9 U1_5.1 | length 71.5
  Top Layer w0.25: U1_5.1 100.566,29.856 101.491,28.931 101.869,28.931 103.3,27.5 103.3,23.5 v1(102.11,22.31)
  Bottom Layer w0.25: J1.9 49.21,17.945 ; v1(102.11,22.31) 100.682,20.882 54.082,20.882 51.605,18.405 ; 49.21,17.945 49.67,18.405 ; 49.21,17.945 49.67,18.405 ; 49.67,18.405 51.605,18.405 ; 49.67,18.405 51.605,18.405
SW12-2: J1.10 U1_6.1 | length 88.4
  Top Layer w0.25: U1_6.1 80.566,29.856 81.491,28.931 81.825,28.931 82.675,28.081 82.675,27.825 83.9,26.6 83.9,24.4 82.26,22.76 v1(82.218,22.76)
  Bottom Layer w0.25: 46.47,17.491 J1.10 46.47,17.491 ; 46.47,17.491 47.384,18.405 ; 46.47,17.491 47.384,18.405 ; 47.384,18.405 47.505,18.405 50.432,21.332 ; 50.432,21.332 80.79,21.332 ; 50.432,21.332 80.79,21.332 ; 80.79,21.332 v1(82.218,22.76) 80.79,21.332
SW24-0: J1.11 U1_7.1 | length 54.8
  Top Layer w0.25: U1_7.1 59.251,29.656 59.526,29.381 59.726,29.381 60.114,28.993 60.281,28.993 60.636,28.638 62.119,28.638 62.675,28.081 62.675,26.432 63.3,25.807 v1(63.3,23.21)
  Bottom Layer w0.25: J1.11 43.73,16.483 44,16.753 44,17.761 44.644,18.405 44.905,18.405 ; 44.905,18.405 49.71,23.21 ; 44.905,18.405 49.71,23.21 ; 49.71,23.21 v1(63.3,23.21) 49.71,23.21
SW24-1: J1.12 U1_8.1 | length 19.8
  Top Layer w0.25: U1_8.1 39.251,29.656 39.526,29.381 39.726,29.381 40.114,28.993 40.281,28.993 40.636,28.638 42.118,28.638 42.675,28.081 42.675,26.432 44.1,25.007 v1(44.1,23.76)
  Bottom Layer w0.25: J1.12 42.394,15.87 42.48,15.87 43.28,16.67 43.46,16.85 43.46,19.847 44,20.387 44,23.66 v1(44.1,23.76)
SW24-2: J1.13 U1_9.1 | length 37.9
  Top Layer w0.25: U1_9.1 19.251,29.656 19.526,29.381 19.726,29.381 20.114,28.993 20.281,28.993 20.636,28.638 22.118,28.638 22.675,28.081 22.675,26.432 24.752,24.355 v1(25.262,24.355) ; v1(27.8,11.8) 33.082,11.8 33.902,10.98 34.698,10.98 35.518,11.8 35.798,11.8 36.651,10.947 37.446,10.947 38.009,11.509 38.009,12.398 37.54,12.867 37.54,13.756 J1.13
  Bottom Layer w0.25: v1(25.262,24.355) 25.457,24.16 26.9,22.717 26.9,12.7 v1(27.8,11.8)
pads on no net: ADC.10 ADC.11 ADC.12 ADC.13 ADC.14 ADC.15 ADC.16 ADC.24 J1.14 J1.15 J1.MH1 J1.MH2 U2_1.2 U2_2.2 U2_3.2 U2_4.2 U2_5.2 U2_6.2 U2_7.2 U2_8.2 U2_9.2
copper on no net:
  other v1: 4,4 194,4 4,50 194,50

## Polygon pours and split planes (outlines as drawn)
GND on Bottom Layer "Ground Plane" (solid, remove dead copper, pour order 3): 0,0 198,0 198,54 0,54

## Silkscreen, mask and mechanical layers (free items; w line width, h text height)
Top Overlay:
  lines w1: 66.1,17.7 66.1,53.6 ; 125.7,17.6 125.7,53.7
  text "24V" at 6.495,18.7 h5
  text "5V" at 149.8,18.556 h5
  text "12V" at 93,17.7 h5
  text "'.ModifiedDate' | Rev. 0.1" at 100.9,15.966 h3
  text "| 1    | 2    | 3    | 4  | / | SCLK | MOSI | MISO | SS |" at 132.7,13 h1.52
  text "4505-WB-AV-SWITCHING" at 95.7,12.836 h3
  text "| 5   | 6   | 7   | 8   | 9   | 10  | 11  | 12  | 13  | / | CH1 | CH2 | CH3 | CH4 | CH5 | CH6 | CH7 | CH8 | CH9 |" at 95.9,0.5 h1.52